# Altium PCB LM2576_Buckconverter.PcbDoc
Units mm, origin at the board's own origin, x right, y up, seen from the top; angles counter-clockwise.
Board outline 73.02 x 28.07 mm, 2 copper layers (Top Layer, Bottom Layer), stack 1.569 mm thick; 9 components, 6 nets, 24 pads, 9 vias.
Unrouted connection lines stored in the file: 10.
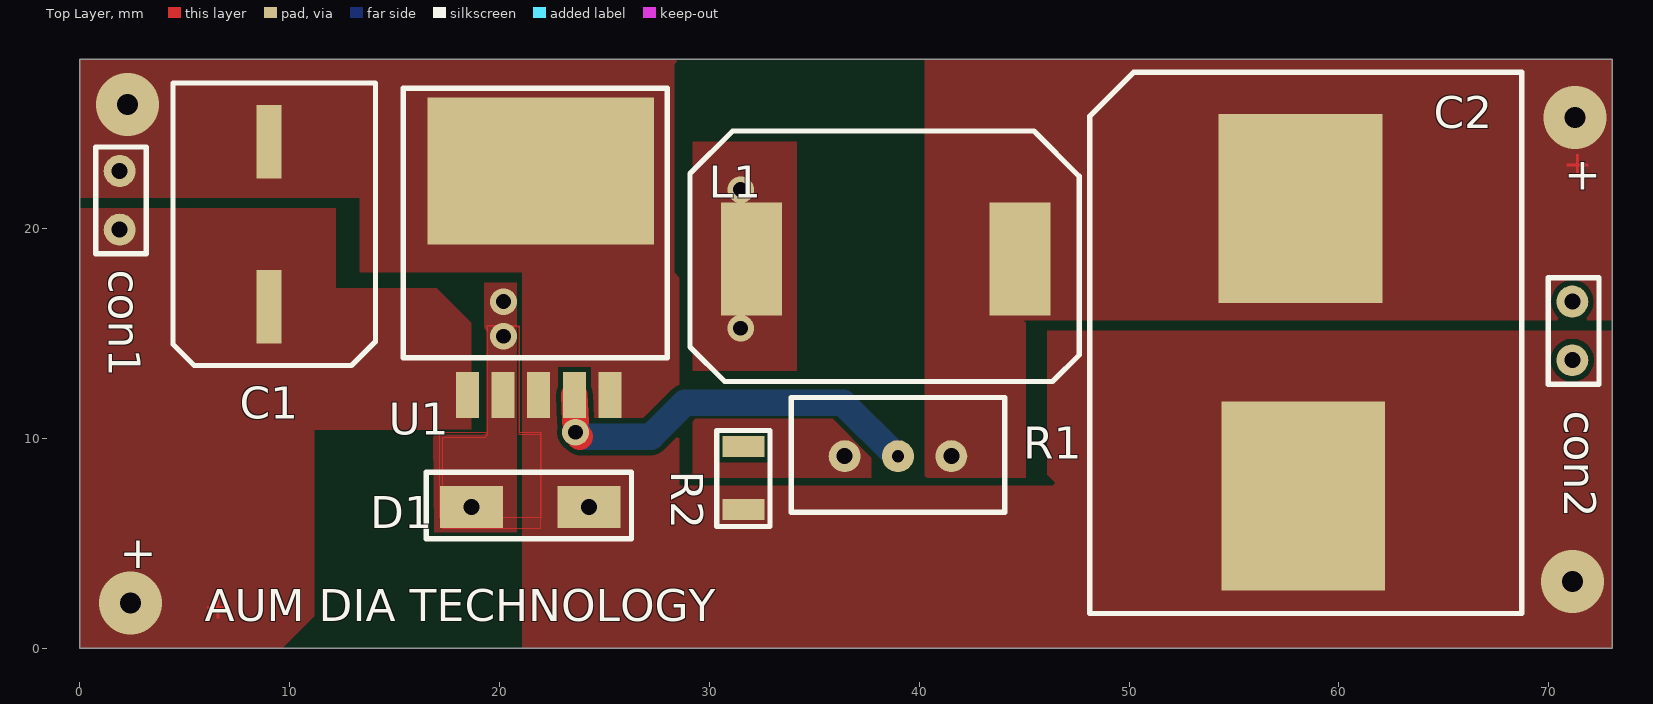
[diagram p0: Top Layer view]
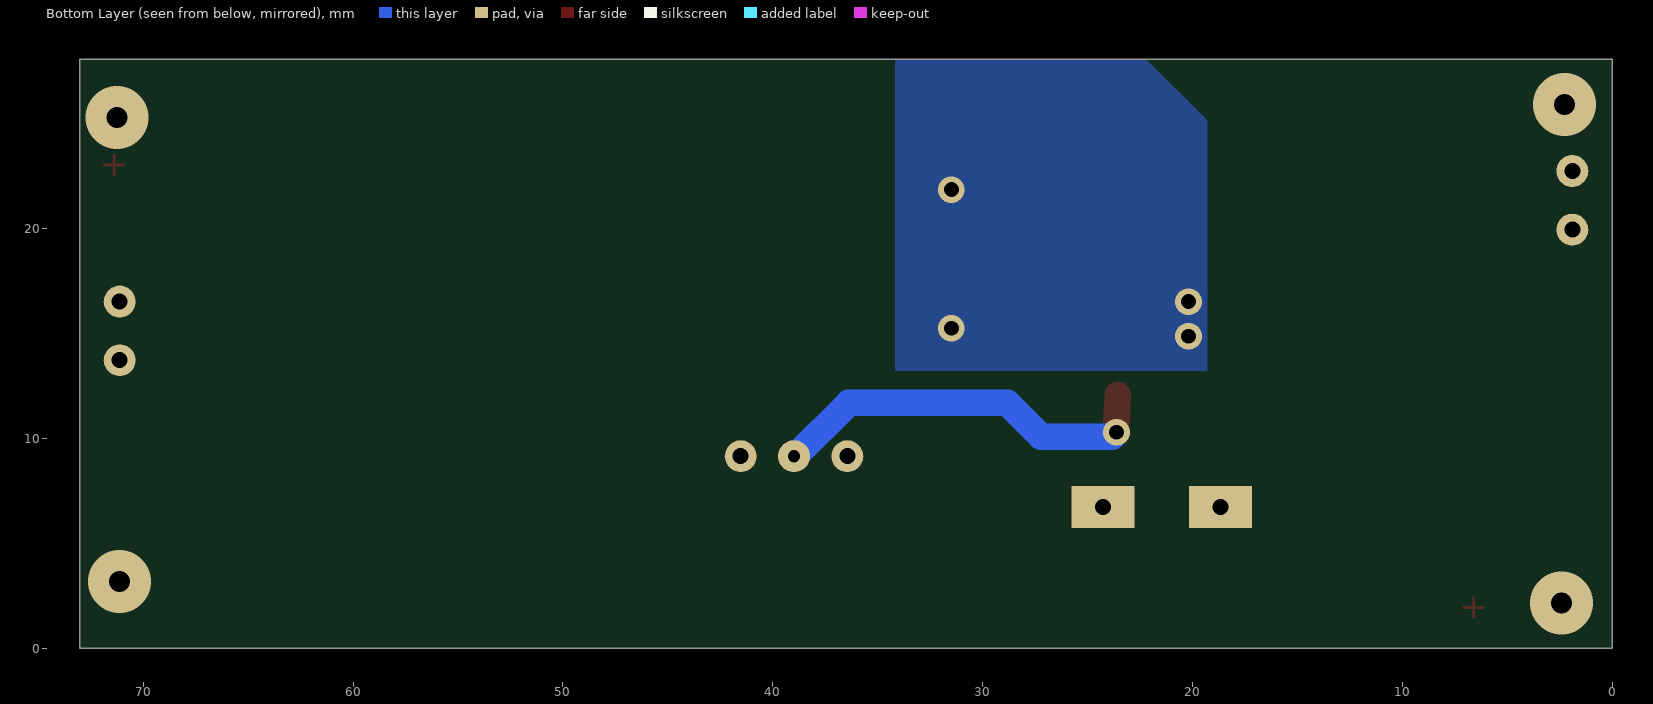
[diagram p1: Bottom Layer view, seen from below]
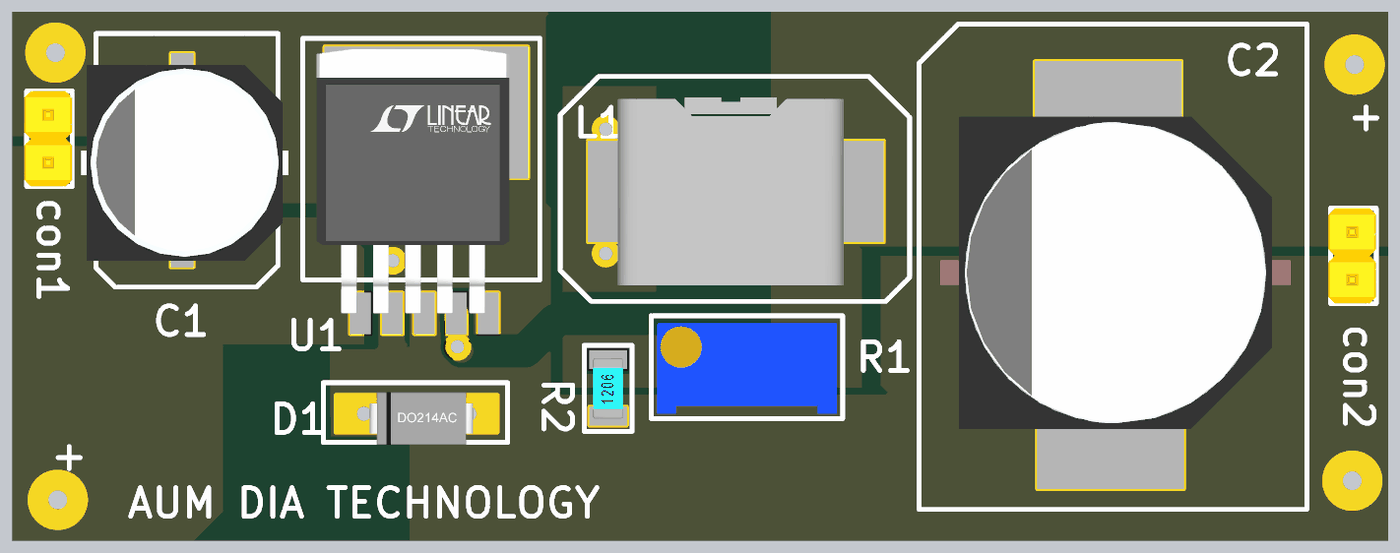
[diagram p2: 3D render of the assembled board from above, using the file's embedded part models]

## Layer stack, top to bottom
Top Solder: solder mask 0.0254, SM-001, Dk 4
Top Layer: signal copper 0.035
Dielectric 1: core 1.4986, Core-043, Dk 4.3
Bottom Layer: signal copper 0.035
Bottom Solder: solder mask 0.0254, SM-001, Dk 4

## Board outline
73.025,28.067 0,28.067 0,0 73.025,0

## Design rules (kind name [scope] priority, off if disabled: settings)
Clearance [All] p1: gap=0.254 ignorepadtopadclearanceinfootprint=FALSE except(0: Arc-Hole Track-Hole SMDPad-Hole THPad-Hole Via-Hole Fill-Hole Poly-Hole Region-Hole Text-Hole)
PolygonConnect [All] p1: connectstyle=Direct reliefconductorwidth=0.254 reliefentries=4 polygonreliefangle="90 Angle" airgapwidth=0.254
RoutingVias [All] p1: holewidth=0.711 width=1.27 viastyle="Through Hole" minholewidth=0.711 minwidth=1.27 maxholewidth=0.711 maxwidth=1.27
SolderMaskExpansion [All] p1: expansion=0.102 istentingtop=FALSE
Width [All] p1: maxlimit=2.54 minlimit=0.254 preferedwidth=0.254 minimp=50.000000 maximp=50.000000 favimp=50.000000
30 further rules are at their usual default settings.

## Classes and differential pairs
component class LM2576_Buckconverter: C2 con1 con2 D1 L1 R1 R2 U1

## Components (designator, comment, footprint, x,y, rotation, side; value= is the part's Value field where it differs from the comment)
C1 "200uF" "220uF Capacitor" 9.017,16.256 r180 top
C2 "1000uF" "1000UF CAP" 58.166,20.955 r0 top
con1 "con?" 2pin 1.905,19.939 r180 top
con2 "con?" 2pin 71.12,13.716 r180 top
D1 "1NS822" 1N5822 18.669,6.731 r0 top
L1 "150uH L" "150uH Inductor" 32.004,18.542 r0 top
R1 "10K" "10K POT" 38.989,9.144 r270 top
R2 "1K" "1K 1206 Resistor" 31.623,9.604 r270 top
U1 "LM2576" LM2576-TO63-S 18.471,12.063 r90 top

## Footprints (in the part's own frame and the unit in brackets; to place one, negate y for a bottom-side part, rotate by r counter-clockwise, add the part's x,y. Pads: shape width x height; smd on the part's side, far side on the other; paste and mask are expansions set on the pad)
"1K 1206 Resistor" [mm]
  rect 1x2 smd: 1(3,0) 2(0,0)
  silkscreen extent -0.76,-1.27 3.81,1.27, body extent -0.08,-0.81 3.12,0.81, height 1.11
1N5822 [mm]
  rect 3x2 hole 0.762: 1(0,0) 2(5.588,0)
  silkscreen extent -2.16,-1.52 7.62,1.65, body extent 0.3,-1.65 5.79,1.14, height 2.3
2pin [mil]
  round 60 hole 30: 1(0,0) 2(0,-110)
  silkscreen extent -50,-155 45,45, body extent -50,-155 50,45, height 374
"10K POT" [mil]
  round 60 hole 30: 1(0,100) 3(0,-100)
  round 60 hole 23: 2(0,0)
  silkscreen extent -110,-200 105,200, body extent -94,-188 94,188, height 455
"150uH Inductor" [mm]
  rect 2.9x5.4 smd: 1(0,0) 2(12.8,0)
  silkscreen extent -2.92,-5.84 15.62,6.1, body extent 0.13,-5 12.13,5, height 6
"220uF Capacitor" [mm]
  rect 1.2x3.5 smd: 1(0,0) 2(0,-7.874)
  silkscreen extent -5.08,-10.67 4.57,2.79, body extent -5.63,-9.01 5.37,1.39, height 10.41
"1000UF CAP" [mm]
  rect 7.8x9 smd: 1(0,0) 1(0,0) 2(0.127,-13.716)
  silkscreen extent -10.03,-19.3 10.54,6.48, body extent -8.92,-15.03 9.68,1.57, height 17.51
LM2576-TO63-S [mm] "AK,6-Pads,Body 7 ,42 x 8 ,51mm( max , IPC  Medium  Density )"
  rect 2.2x1.1 smd: 1(0,0) 2(0,-1.7) 3(0,-3.4) 4(0,-5.1) 5(0,-6.8)
  rect 7x10.8 smd: 3(10.67,-3.5)
  silkscreen extent 1.78,-9.53 14.6,3.05, body extent 0,-7.91 14.05,2.32, height 4.38

## Part data
C1 C2: library part "Electrolytic Cap"
con1 con2: library part 2pinconnector
R1: library part "Variable Resistor"
R2: library part Resistor

## Via types
v1: diameter 1.27, hole 0.711, Top Layer to Bottom Layer, 5 vias
v2: diameter 3, hole 1, Top Layer to Bottom Layer, 4 vias

## Nets (pads, with @x,y where several pads share a name; then routed paths per layer and width w, separated by ;. In a path a pad name is that pad's centre, name@x,y a point inside that pad or via, vN(x,y) a via of type N, cw(c..) or ccw(c..) an arc to the next point about the centre after c; other vN are vias at no path point)
GND: C1.2 C2.2 con1.2 con2.2 D1.2 R2.1 U1.3 U1.5
  other v2: 71.12,3.175 2.286,25.908
NetC1_1: C1.1 con1.1 U1.1
  other v2: 2.413,2.159
NetC2_1: C2.1 con2.1 L1.2 R1.1
  other v2: 71.247,25.273
NetD1_1: D1.1 L1.1 U1.2
  other v1: 20.193,14.859 31.496,15.24 20.193,16.51 31.496,21.844
NetR1_2: R1.2 R2.2 | length 18.4
  Top Layer w1.27: 23.571,12.063 v1@23.624,10.8 ; v1(23.622,10.287) v1@23.835,10.074 ; R1.2@38.92,9.144 R1.2
  Bottom Layer w1.27: v1@23.835,10.074 27.219,10.074 28.829,11.684 36.38,11.684 R1.2@38.92,9.144
NetR1_3: R1.3 U1.4

## Polygon pours and split planes (outlines as drawn)
no net on Multi-Layer "NONET_L02_P-001" (solid): 7.366,21.209
no net on Multi-Layer "NONET_L02_P-001" (solid): -5.334,31.115
no net on Multi-Layer "NETC1_1_L01_P002" (solid): 19.431,15.367
NetD1_1 on Multi-Layer "NETC1_1_L01_P002" (solid): 17.78,4.572
NetC1_1 on Multi-Layer "NETC1_1_L01_P002" (solid): -7.112,12.954
no net on Multi-Layer "NETC1_1_L01_P002" (solid): 0,21.209
no net on Multi-Layer "NETC1_1_L01_P002" (solid): 41.148,10.541
no net on Multi-Layer "NETC1_1_L01_P002" (solid): 41.275,10.16
no net on Multi-Layer "NETC1_1_L01_P002" (solid): 19.367,10.096
NetC1_1 on Top Layer "NETC1_1_L01_P002" (solid, pour order 7): 0,0 9.652,0 11.176,1.524 11.176,10.414 18.669,10.414 18.669,15.494 17.018,17.145 12.192,17.145 12.192,20.955 0,20.955
NetC2_1 on Top Layer "NETC1_1_L01_P002" (solid, pour order 8): 40.259,28.067 73.025,28.067 73.025,15.621 44.958,15.621 45.085,15.494 45.085,8.128 40.386,8.128 40.259,8.001
GND on Top Layer "NETC1_1_L01_P002" (solid, pour order 6): 28.321,17.907 28.575,17.653 28.575,7.747 46.355,7.747 46.482,7.874 46.101,8.255 46.101,15.113 73.025,15.113 73.025,0 22.733,0 21.082,0 21.082,10.668 21.082,17.907 13.335,17.907 13.335,21.463 0,21.463 0,28.067 28.575,28.067 28.321,27.813
NetD1_1 on Top Layer "NETC1_1_L01_P002" (solid, pour order 29): 29.21,24.13 34.163,24.13 34.163,13.208 29.21,13.208
NetR1_3 on Top Layer "NETC1_1_L01_P002" (solid, pour order 30): 37.719,10.922 37.719,8.128 29.21,8.128 29.21,10.922
NetD1_1 on Top Layer "NETC1_1_L01_P002" (solid, pour order 28): 20.955,10.16 20.955,17.399 19.286,17.399 19.286,10.16 17.209,10.16 16.841,10.16 16.905,5.524 20.955,5.524
NetD1_1 on Top Layer "NETC1_1_L01_P002" (solid, shelved, pour order 9): 19.431,15.367 20.955,15.367 20.955,10.287 21.971,10.287 21.971,6.223 17.145,6.223 17.145,10.287 19.431,10.287
NetD1_1 on Top Layer "NETC1_1_L01_P002" (solid, shelved, pour order 10): 21.971,5.715 21.971,10.16 20.955,10.16 20.955,15.24 20.828,15.367 19.431,15.367 19.431,10.16 19.304,10.033 17.272,10.033 17.272,5.715
NetD1_1 on Bottom Layer "NETC1_1_L01_P002" (solid, pour order 12): 19.304,25.146 22.225,28.067 34.163,28.067 34.163,13.208 19.304,13.208

## Other copper
Top Layer:
  text "+" at 70.685,22.479 h1.2
  text "+" at 5.915,1.397 h1.2

## Silkscreen, mask and mechanical layers (free items; w line width, h text height)
Top Overlay:
  text "+" at 70.739,21.844 h1.52
  text "+" at 1.905,3.81 h1.52
  text "AUM DIA TECHNOLOGY" at 5.969,1.27 h1.52
Mechanical 1:
  lines w0.254: -13.335,100.076 -13.335,-1.778 ; -13.081,99.695 -13.081,-1.651 139.065,-1.651 139.065,99.695 ; -12.827,50.927 139.573,50.927 ; 139.446,50.673 101.409,50.673 -12.7,50.673 ; -13.335,-1.778 ccw(c-13.208,-1.778) -13.208,-1.905 ; -13.335,-1.778 ccw(c-13.208,-1.778) -13.208,-1.905 ; -13.208,-1.905 139.192,-1.905 ; -12.7,50.673 -12.7,50.673 ; 139.192,-1.905 ccw(c139.192,-1.778) 139.319,-1.778 ; 139.192,-1.905 ccw(c139.192,-1.778) 139.319,-1.778 ; 139.319,-1.778 139.319,99.822 ; 139.319,99.822 ccw(c139.192,99.822) 139.192,99.949 cw(c139.192,99.822) 139.319,99.822 ; -13.335,99.822 cw(c-13.208,99.822) -13.208,99.949 ccw(c-13.208,99.822) -13.335,99.822 ; 0,0 73.025,0 73.025,28.067 0,28.067 0,0